# Altium PCB PCB2.0.PcbDoc (part 3 of 4)
Units mm, origin at the board's own origin, x right, y up, seen from the top; angles counter-clockwise.
Board outline 152.4 x 101.6 mm, 4 copper layers (Top Layer, Mid-Layer 1, Mid-Layer 2, Bottom Layer); 254 components, 501 nets, 1699 pads, 910 vias.
Unrouted connection lines stored in the file: 81.
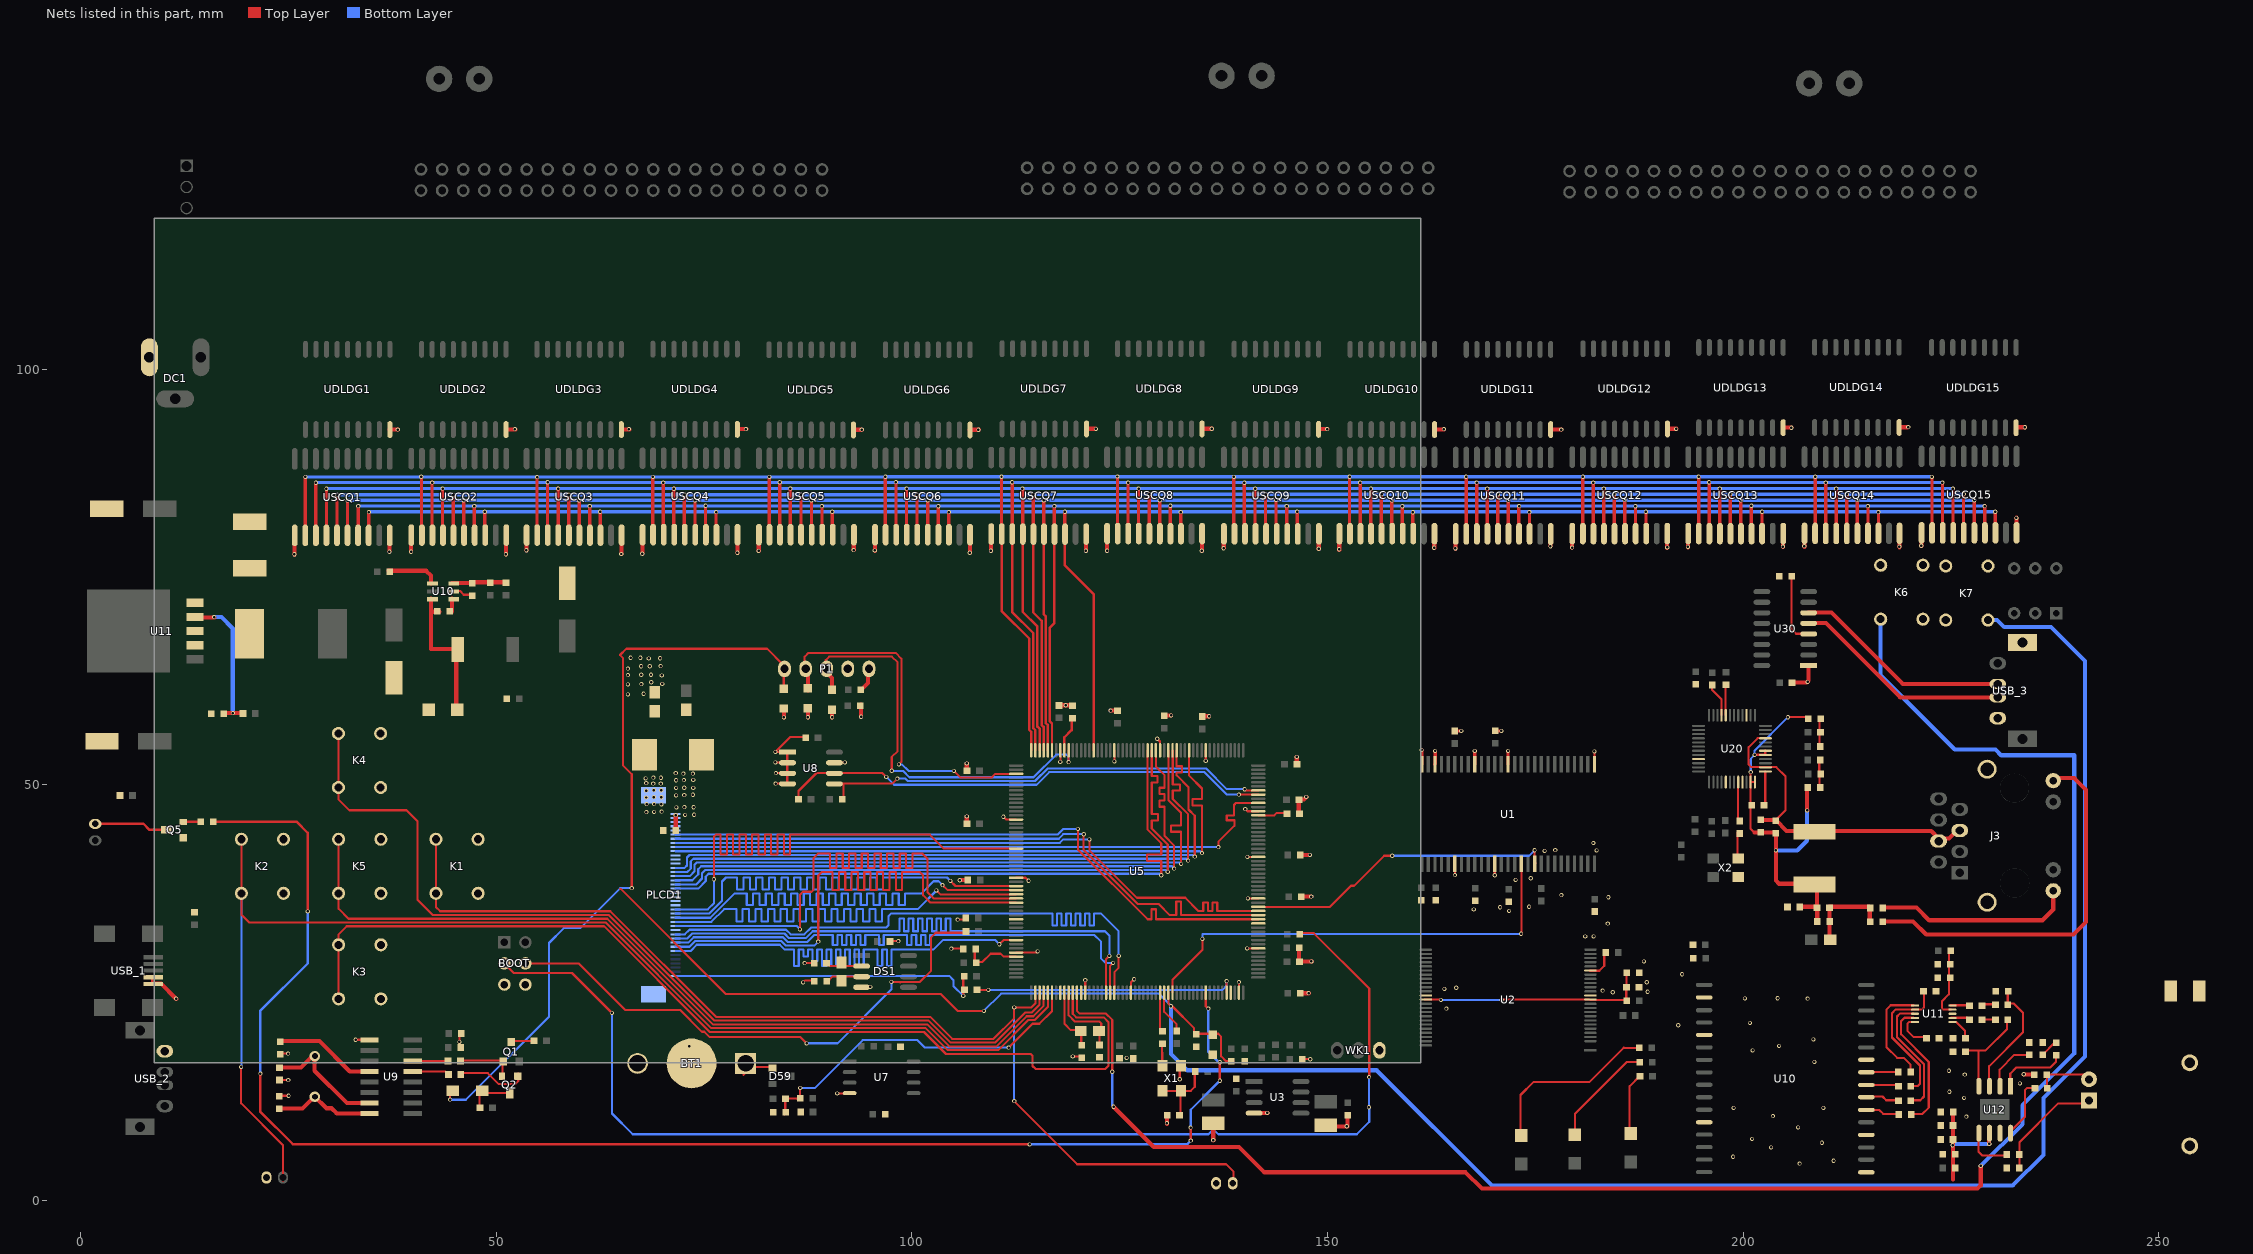
[diagram p5: the nets of this part, all layers, seen from the top]

## Via types
v1: diameter 0.5, hole 0.3, Top Layer to Bottom Layer, 910 vias

## Nets (pads, with @x,y where several pads share a name; then routed paths per layer and width w, separated by ;. In a path a pad name is that pad's centre, name@x,y a point inside that pad or via, vN(x,y) a via of type N, cw(c..) or ccw(c..) an arc to the next point about the centre after c; other vN are vias at no path point) (continued)
FMC_SDNRAS: U1.18 U5.70 | length 37.8
  Top Layer w0.254: U5.70@141.676,35.322 150.305,35.322 152.833,37.85 153.207,37.85 156.818,41.462 v1(157.8,41.462) ; v1(174.925,42.125) 174.925,40.684 175.025,40.584 U1.18@174.928,40.487
  Bottom Layer w0.254: v1(157.8,41.462) 174.262,41.462 v1(174.925,42.125)
FMC_SDNWE: U1.16 U5.35 | length 54.8
  Top Layer w0.254: U5.35@131.351,24.997 131.351,26.567 134.956,30.172 v1(134.956,31.457) ; v1@173.325,32.075 U1.16@173.325,40.034
  Bottom Layer w0.254: v1(134.956,31.457) 134.956,31.993 135.011,32.048 v1@173.298,32.048
  other v1: 173.3,32.075
FNSN: R100.1 U5.43 | length 181.9
  Top Layer w0.3: R100.1@15.9,45.575 25.95,45.575 27.3,44.225 v1(27.3,34.775) ; v1(21.6,15.25) 21.6,10.65 25.5,6.75 114.15,6.75 v1@114.2,6.7 ; v1(133.525,8.75) 133.525,7.225 v1(133.55,7.2) ; U5.43@135.351,24.997 135.351,23.374 v1@135.65,23.075 ; v1(137.05,16.625) v1(137.05,14.4) v1@137.075,14.375
  Bottom Layer w0.3: v1@21.6,15.225 v1(21.6,15.25) 21.6,22.825 27.3,28.525 v1(27.3,34.775) ; v1(114.15,6.725) 133.075,6.725 v1(133.55,7.2) v1@133.6,7.25 ; v1@133.55,8.7 133.55,10.9 v1(137.05,14.4) ; v1(135.675,23.075) 135.675,17.873 v1@137,16.548
GND: *R16.1 BOOT.5 BOOT.6 BT1.1@66.982,16.48 BT1.2 C1.1 C2.1 C3.1 C4.1 C5.1 C6.1 C7.1 C8.1 C9.1 C10.1 C11.1 C12.1 C14.1 C15.1 C16.1 C19.1 C20.2 C21.1 C22.2 C23.2 C24.1 C25.1 C26.2 C27.1 C28.1 C29.1 C30.1 C31.1 C32.1 C33.1 C34.1 C35.1 C36.1 C37.1 C38.1 C39.1 C40.1 C41.1 C42.1 C43.1 C44.1 C45.1 C46.1 C47.1 C48.1 C49.1 C52.1 C53.2 C54.2 C55.1 C56.1 C57.1 C58.1 C59.1 C61.1 C71.2 C73.2 C78.2 C79.2 C80.1 C81.1 C82.1 C83.1 C100.1 C101.2 C?.2 CA1.2 CA2.2 CD1.1 CD2.1 CE2.2 CE3.2 CE4.2 CE5.2 D2.1 D3.1 D18.2 D22.2 D23.2 D24.2 DC1.2 DS1.4 FB7.1 FB9.1 K1.1 K2.1 K3.1 K4.1 K5.1 K6.1 K7.2 P1.2 P15.2 P16.2 Q5.1 R2.1 R3.1 R35.1 R51.2 R52.2 R55.2 R?.1 U1.6 U1.12 U1.28 U1.41 U1.46 U1.52 U1.54 U2.13 U2.36 U3.4 U5.14 U5.25 U5.51 U5.60 U5.72 U5.82 U5.93 U5.114 U5.125 U5.136 U5.149 U5.170 U5.184 U5.202 U7.4 U8.1 U8.2 U8.3 U8.4 U8.7 U9.1 U10.2 U10.5@195.335,19.905 U10.12 U10.17 U10.20 U10.26 U11.3@13.725,68.5 U11.5@13.725,71.9 U11.8 U12.7 U20.15 U20.33 U20.41 U20.45 U30.1 UDLDG1.9 UDLDG2.9 UDLDG3.9 UDLDG4.9 UDLDG5.9 UDLDG6.9 UDLDG7.9 UDLDG8.9 UDLDG9.9 UDLDG10.9 UDLDG11.9 UDLDG12.9 UDLDG13.9 UDLDG14.9 UDLDG15.9 USB_1.4 USB_1.5 USB_2.4 USB_3.4 USB_3.5@233.65,67.125 USCQ1.1 USCQ1.10 USCQ2.1 USCQ2.10 USCQ3.1 USCQ3.10 USCQ4.1 USCQ4.10 USCQ5.1 USCQ5.10 USCQ6.1 USCQ6.10 USCQ7.1 USCQ7.10 USCQ8.1 USCQ8.10 USCQ9.1 USCQ9.10 USCQ10.1 USCQ10.10 USCQ11.1 USCQ11.10 USCQ12.1 USCQ12.10 USCQ13.1 USCQ13.10 USCQ14.1 USCQ14.10 USCQ15.1 USCQ15.10 WK1.3 X1.2 X2.2 | length 186.9
  Top Layer w0.254: C80.1@24.2,17.662 v1(24.925,17.662) ; C81.1@24.225,14.462 v1(24.95,14.462) ; C82.1@24.25,12.587 v1(25,12.587) ; v1(33.055,19.332) U9.1@34.525,19.332 ; U10.2@44.65,73.34 45.61,73.34 46.075,72.875 R55.2@47.3,72.875 ; C78.2@45.55,18.312 C79.2@45.55,19.812 ; v1(83.575,52.687) U8.2@84.995,52.687 ; v1(83.585,50.147) 84.995,50.147 U8.2@84.995,52.687 ; v1(83.63,51.417) U8.3@84.995,51.417 ; v1(86.9,26.225) 87.15,26.475 CD2.1@88.225,26.475 ; v1(87.075,28.55) CD1.1@88.25,28.55 ; C14.1@87.075,55.75 85.363,55.75 v1(83.57,53.957) 84.995,53.957 U8.2@84.995,52.687 ; U8.7@90.632,52.687 v1(91.925,52.687) ; v1(91.014,12.876) U7.4@92.171,12.876 ; DS1.4@93.65,25.677 v1(94.99,25.677) ; C3.1@97.15,31.175 97.175,31.2 v1(98.375,31.2) ; v1@104.725,30.325 *R16.1@106.05,30.325 ; v1(105.5,33.775) R2.1@106.475,33.775 ; v1(111,46.162) 111.34,45.822 U5.170@112.526,45.822 ; U5.202@112.526,29.822 114.997,29.822 v1(115.125,29.95) ; U5.184@112.526,38.822 113.665,38.822 v1(114.025,38.462) ; v1(117.851,52.763) U5.149@117.851,54.147 ; v1(119.35,17.325) C21.1@120.646,17.325 ; C21.1@120.375,17.275 120.471,17.275 C21.1@120.421,17.325 ; U5.14@120.851,24.997 v1(120.851,26.511) ; v1(124.351,52.813) U5.136@124.351,54.147 ; U5.25@126.351,24.997 126.351,26.238 v1(126.725,26.612) ; v1(129.525,55.537) 129.851,55.211 U5.125@129.851,54.147 ; v1(132.225,14.575) X1.2@132.225,16.2 ; v1(135.351,52.873) U5.114@135.351,54.147 ; U5.51@139.351,24.997 v1(139.351,26.261) ; v1(140.1,47.087) 140.365,46.822 U5.93@141.676,46.822 ; v1(140.335,30.322) U5.60@141.676,30.322 ; v1(140.365,41.322) U5.82@141.676,41.322 ; v1(140.416,36.322) U5.72@141.676,36.322 ; FB7.1@146.85,17 v1@147.9,17 ; v1(165.327,39.139) U1.6@165.327,40.487 ; v1(170.128,39.115) U1.12@170.128,40.487 ; v1(182.125,54.025) 182.125,52.489 U1.28@182.128,52.487
  Top Layer w0.4: v1(161.325,54.2) 161.325,52.489 U1.54@161.327,52.487 ; U1.52@162.927,52.487 162.925,52.489 162.95,52.514 v1(162.95,54.075) ; C9.1@165.327,56.487 v1(166.1,56.487) ; v1(167.725,54.075) 167.725,52.489 U1.46@167.727,52.487 ; C8.1@170.128,56.487 v1(170.925,56.487) ; v1(171.725,54.075) 171.725,52.49 U1.41@171.728,52.487
  Top Layer w0.5: USB_1.4@8.675,26.875 8.675,26.075 9.625,26.075 v1@11.475,24.225 ; v1@25.71,77.69 USCQ1.1@25.71,80.05 ; v1@37.14,78.06 USCQ1.10@37.14,80.05 ; UDLDG1.9@37.16,92.775 v1@38.175,92.775 ; v1@39.735,78.06 USCQ2.1@39.735,80.075 ; UDLDG2.9@51.135,92.775 v1@52.275,92.775 ; v1@51.165,77.74 USCQ2.10@51.165,80.075 ; v1@53.61,78.19 USCQ3.1@53.61,80.075 ; UDLDG3.9@65.01,92.775 v1@66,92.775 ; v1@65.04,77.76 USCQ3.10@65.04,80.075 ; v1@67.56,77.835 USCQ4.1@67.56,80.125 ; UDLDG4.9@78.96,92.8 v1@80.075,92.8 ; v1@78.99,77.915 USCQ4.10@78.99,80.125 ; v1@81.56,78.16 USCQ5.1@81.56,80.125 ; UDLDG5.9@92.935,92.725 v1@93.95,92.725 ; v1@92.99,78.265 USCQ5.10@92.99,80.125 ; v1@95.535,78.165 USCQ6.1@95.535,80.125 ; v1@105.775,38.55 C28.1@106.7,38.55 ; C29.1@106.6,45.325 v1(106.6,46.2) ; C30.1@106.6,51.7 v1(106.6,52.575) ; UDLDG6.9@106.96,92.725 v1@108.05,92.725 ; v1@106.965,77.94 USCQ6.10@106.965,80.125 ; v1@109.51,78.16 USCQ7.1@109.51,80.2 ; C31.1@117.675,59.575 C26.2@119.275,59.575 ; v1@120.94,78.165 USCQ7.10@120.94,80.2 ; UDLDG7.9@120.985,92.85 v1@122.1,92.85 ; v1@123.46,78.165 USCQ8.1@123.46,80.25 ; v1(123.9,58.925) C32.1@124.7,58.925 ; C33.1@130.325,58.35 v1(131.175,58.35) ; v1@130.675,9.2 C20.2@130.675,10.275 ; UDLDG8.9@134.885,92.85 v1@136.1,92.85 ; v1@134.89,78.165 USCQ8.10@134.89,80.25 ; C34.1@134.9,58.25 v1(135.75,58.25) ; v1@136.25,7.2 CA1.2@136.25,9.3 ; v1@137.51,78.49 USCQ9.1@137.51,80.225 ; U3.4@141.15,10.515 v1@142.765,10.515 ; v1@146.275,53.35 146.3,53.325 146.3,52.5 C35.1@146.325,52.525 ; C25.1@146.55,46.6 146.55,48.25 147.175,48.25 v1@147.45,48.525 ; C39.1@146.575,28.775 R3.1@146.575,30.4 ; C39.1@146.6,28.75 v1@148.15,28.75 ; C40.1@146.7,24.925 v1@147.75,24.925 ; C37.1@146.7,41.575 v1(147.875,41.575) ; C38.1@146.8,36.55 v1(148.05,36.55) ; UDLDG9.9@148.91,92.8 v1@150,92.8 ; v1@148.94,78.39 USCQ9.10@148.94,80.225 ; CA2.2@149.75,9.075 149.95,8.875 152.4,8.875 C19.1@152.4,10.25 ; v1@151.41,78.265 USCQ10.1@151.41,80.25 ; v1@162.84,78.515 USCQ10.10@162.84,80.25 ; UDLDG10.9@162.86,92.775 v1@164,92.775 ; v1@165.41,78.41 USCQ11.1@165.41,80.225 ; UDLDG11.9@176.835,92.775 v1@178.175,92.775 ; v1@176.84,78.735 USCQ11.10@176.84,80.225 ; v1@179.435,78.54 USCQ12.1@179.435,80.25 ; v1@190.865,78.535 USCQ12.10@190.865,80.25 ; UDLDG12.9@190.885,92.85 v1@192,92.85 ; v1@193.385,78.59 USCQ13.1@193.385,80.25 ; UDLDG13.9@204.81,93 v1@205.85,93 ; v1@204.815,78.64 USCQ13.10@204.815,80.25 ; C100.1@205.875,62.325 207.675,62.325 207.875,62.525 U30.1@207.875,64.375 ; v1@207.385,78.635 USCQ14.1@207.385,80.275 ; UDLDG14.9@218.76,93.025 v1@219.8,93.025 ; v1@218.815,78.59 USCQ14.10@218.815,80.275 ; v1@221.46,78.735 USCQ15.1@221.46,80.35 ; UDLDG15.9@232.835,93 232.86,93.025 v1(233.925,93.025) ; USCQ15.10@232.89,80.35 v1@232.89,82.14 ; v1@233.775,15.15 C58.1@235.025,15.15
  Top Layer w0.508: v1(84.59,58.102) D24.2@84.59,58.989 ; v1(87.485,58.122) D23.2@87.485,58.989 ; v1(90.381,58.131) D22.2@90.381,58.989 ; v1(93.875,58.2) C2.1@93.875,59.675
  Top Layer w1: BT1.2@73.207,15.08 v1(73.207,18.569)
  other v1: 206.8,4.425 210.9,4.775 198.8,5.25 203.375,6.375 209.5,6.925 136.25,7.25 201.1,7.4 206.625,8.775 152.325,8.925 130.675,9.3 226.875,10.075 203.6,10.15 142.75,10.525 198.875,11.125 209.675,11.125 226.6,12.325 224.825,13.075 233.325,14.075 226.675,15.125 233.775,15.175 224.775,15.6 208.6,16.65 147.925,16.975 125.825,17.15 201.15,18.05 204.35,18.575 45.55,19.062 208.475,19.375 192.2,21.075 200.825,21.35 164.3,23.075 11.45,24.275 207.775,24.275 200.225,24.3 204.15,24.325 147.725,24.95 184.325,25.05 188.525,25.1 183.1,25.25 164.075,25.45 165.5,25.575 188.425,26.25 192.675,27.2 148.075,28.75 188.075,28.75 104.75,30.3 181.025,31.75 182.025,31.75 183.725,33.3 171.85,34.825 167.6,35 170.775,35.275 174.25,35.325 183.8,36.475 178.15,36.725 105.75,38.525 172.625,38.55 174.45,38.75 176.125,42.05 182.375,42.1 177.4,42.15 182,43 147.45,48.55 146.3,53.35 118.5,59.575 65.828,60.878 67.7,60.962 65.828,62.078 67.45,62.112 69.95,62.137 68.625,62.337 207.775,62.375 69.9,63.162 65.828,63.203 67.425,63.237 68.6,63.237 65.828,63.978 67.4,64.262 68.45,64.262 69.75,64.287 68.325,65.212 69.7,65.237 66.15,65.287 67.325,65.287 25.7,77.75 51.15,77.75 65.025,77.775 67.55,77.8 79,77.925 106.95,77.925 37.125,78.05 39.725,78.05 81.55,78.15 109.5,78.175 120.925,78.175 123.475,78.175 134.875,78.175 95.525,78.2 53.6,78.225 92.975,78.25 151.4,78.35 148.95,78.4 165.4,78.45 137.5,78.475 162.825,78.525 179.425,78.55 190.875,78.575 193.375,78.625 204.8,78.675 218.825,78.675 176.825,78.7 207.375,78.725 221.45,78.775 232.9,82.125 108,92.725 38.125,92.75 93.95,92.75 178.125,92.75 52.225,92.8 65.95,92.8 80.025,92.8 149.95,92.8 164,92.8 122.125,92.825 191.95,92.825 136.075,92.85 205.825,92.975 219.875,93.05
GPIO0: U5.49
HALL1_IN: U5.8
IIC_SCL: R12.2 U5.97 U8.6 | length 61.1
  Top Layer w0.254: R12.2@86.275,48.3 86.35,48.375 86.35,49.25 88.517,51.417 U8.6@90.632,51.417 ; 89.077,51.417 U8.6@90.632,51.417 ; v1(96.9,50.962) 96.445,51.417 U8.6@90.632,51.417 ; v1(139.335,48.822) U5.97@141.676,48.822
  Bottom Layer w0.254: v1(96.9,50.962) 97.85,50.012 115,50.012 116.508,51.52 135.206,51.52 137.904,48.822 v1(139.335,48.822)
IIC_SDA: R13.2 U5.98 U8.5 | length 55.1
  Top Layer w0.254: U8.5@90.632,50.147 91.775,50.147 ; R13.2@91.4,48.3 91.775,48.675 91.775,50.147 ; v1(98.25,50.75) 97.647,50.147 91.775,50.147 ; v1(140.025,49.475) 140.178,49.322 U5.98@141.676,49.322
  Bottom Layer w0.254: v1(98.25,50.75) 99.223,50.75 99.509,50.464 114.813,50.464 116.321,51.972 135.393,51.972 137.891,49.475 v1@140,49.475
JTCK-SWCLK: D23.1 P1.4 U5.159 | length 43.5
  Top Layer w0.254: P1.4@87.08,63.612 87.08,65.411 87.55,65.881 98.028,65.881 98.722,65.187 98.722,52.759 v1(98.425,52.462) ; v1(105.05,51.675) 105.863,50.862 109.567,50.862 110.028,51.322 U5.159@112.526,51.322
  Top Layer w0.508: D23.1@87.485,61.389 P1.4@87.485,63.207
  Bottom Layer w0.254: v1(98.425,52.462) 98.789,52.462 99.576,51.675 v1(105.05,51.675)
JTMS-SWDIO: D22.1 P1.3 U5.147 | length 51.2
  Top Layer w0.254: P1.3@89.62,63.612 89.62,65.007 90.042,65.429 97.575,65.429 98.27,64.734 98.27,54.057 97.575,53.362 v1(97.575,51.687) ; v1(118.851,52.738) U5.147@118.851,54.147
  Top Layer w0.508: P1.3@89.62,63.612 90.381,62.851 D22.1@90.381,61.389
  Bottom Layer w0.254: v1(97.575,51.687) 98.925,51.687 99.696,50.916 114.625,50.916 117.346,53.637 118.575,53.637 118.851,53.361 v1(118.851,52.738)
KEY1: K1.2 P15.1 U5.2 | length 134.6
  Top Layer w0.254: K1.2@42.723,43.451 K1.2@42.723,36.951 42.723,35.289 43.225,34.787 63.712,34.787 76.425,22.074 102.201,22.074 104.849,19.426 108.48,19.426 ; 107.5,19.426 108.48,19.426 ; v1(112.3,11.937) 119.887,4.35 137.8,4.35 138.7,3.45 138.7,2.025 P15.1@138.5,1.825 ; U5.2@114.851,24.997 114.851,23.688 114.375,23.212 v1(112.3,23.212) 112.3,21.915 109.811,19.426 108.48,19.426
  Bottom Layer w0.254: v1(112.3,11.937) v1(112.3,23.212)
KEY2: K2.2 U5.5 | length 156.5
  Top Layer w0.254: v1(19.275,16.05) 19.275,11.675 24.325,6.625 24.325,2.325 ; K2.2@19.304,43.451 K2.2@19.304,36.951 19.304,34.396 20.269,33.431 23.476,33.431 ; 20.656,33.431 23.476,33.431 ; U5.5@116.351,24.997 116.351,23.27 114.783,21.702 114.005,21.702 110.373,18.07 104.287,18.07 101.64,20.718 75.863,20.718 63.151,33.431 23.476,33.431
  Bottom Layer w0.254: K2.2@19.304,36.951 19.304,15.871 v1@19.325,15.85
KEY3: K3.2 U5.11 | length 121.3
  Top Layer w0.254: K3.2@31.013,24.251 K3.2@31.013,30.751 31.013,32 31.992,32.979 62.963,32.979 75.676,20.266 101.452,20.266 104.1,17.618 114.294,17.618 114.512,17.4 114.512,16.175 114.875,15.812 123.275,15.812 123.648,16.185 123.648,21.427 123.059,22.016 119.775,22.016 119.351,22.44 U5.11@119.351,24.997
KEY4: K4.2 U5.3 | length 113.3
  Top Layer w0.254: K4.2@30.988,56.179 K4.2@30.988,49.679 30.988,48.249 32.3,46.937 39.175,46.937 40.5,45.612 40.5,36.162 42.327,34.335 63.525,34.335 76.238,21.622 102.014,21.622 104.662,18.974 109.999,18.974 113.631,22.606 114.409,22.606 115.351,23.549 U5.3@115.351,24.997
KEY5: K5.2 U5.4 | length 103.7
  Top Layer w0.254: K5.2@31.013,43.451 K5.2@31.013,36.951 31.013,35.074 32.204,33.883 63.338,33.883 76.05,21.17 101.827,21.17 104.475,18.522 110.186,18.522 113.818,22.154 114.596,22.154 115.851,23.409 U5.4@115.851,24.997
KEY6: K6.2 U5.12 | length 216.5
  Top Layer w0.254: U5.12@119.851,24.997 119.851,22.817 120.2,22.468 123.357,22.468 124.1,21.725 v1(124.1,15.475)
  Top Layer w0.5: v1(124.252,11.264) 129.091,6.425 139.35,6.425 142.4,3.375 166.625,3.375 168.575,1.425 228.225,1.425 228.6,1.8 v1(228.6,4.15)
  Bottom Layer w0.254: v1(124.1,15.475) 124.1,11.416 v1(124.252,11.264)
  Bottom Layer w0.5: K6.2@216.545,69.95 216.545,63.18 225.475,54.25 230.375,54.25 231.075,53.55 239.85,53.55 239.85,17.675 233.625,11.45 233.625,9.15 v1@228.6,4.125
KEY7: U5.13
LCD_B3: PLCD1.24 U5.177 | length 78.7
  Top Layer w0.254: v1(76.175,38.637) 76.175,43.787 76.4,44.012 76.962,44.012 76.962,41.625 77.724,41.625 77.724,44.012 78.486,44.012 78.486,41.625 79.248,41.625 79.248,44.012 80.01,44.012 80.01,41.625 80.772,41.625 80.772,44.012 81.534,44.012 81.534,41.625 82.296,41.625 82.296,44.012 83.058,44.012 83.058,41.625 83.82,41.625 83.82,44.012 84.582,44.012 84.582,41.625 85.344,41.625 85.344,44.012 102.15,44.012 103.84,42.322 U5.177@112.526,42.322
  Bottom Layer w0.254: PLCD1.24@71.575,35.012 75.45,35.012 76.175,35.737 v1(76.175,38.637)
LCD_B4: PLCD1.25 U5.186 | length 78.7
  Top Layer w0.254: v1(104.625,38.437) 105.24,37.822 U5.186@112.526,37.822
  Bottom Layer w0.254: PLCD1.25@71.575,34.512 75.589,34.512 77.145,36.067 77.145,38.367 77.625,38.847 78.968,38.847 78.968,37.421 79.73,37.421 79.73,38.847 80.492,38.847 80.492,37.421 81.254,37.421 81.254,38.847 82.016,38.847 82.016,37.421 82.778,37.421 82.778,38.847 83.54,38.847 83.54,37.421 84.302,37.421 84.302,38.847 85.064,38.847 85.064,37.421 85.826,37.421 85.826,38.847 86.588,38.847 86.588,37.421 87.35,37.421 87.35,38.847 88.112,38.847 88.112,37.421 88.874,37.421 88.874,38.847 89.636,38.847 89.636,37.421 90.398,37.421 90.398,38.847 91.16,38.847 91.16,37.421 91.922,37.421 91.922,38.847 92.684,38.847 92.684,37.421 93.446,37.421 93.446,38.847 94.208,38.847 94.208,37.421 94.97,37.421 94.97,38.847 95.732,38.847 95.732,37.421 96.494,37.421 96.494,38.847 104.215,38.847 v1(104.625,38.437)
LCD_B5: PLCD1.26 U5.187 | length 78.7
  Top Layer w0.254: v1(103.675,37.937) 104.29,37.322 U5.187@112.526,37.322
  Bottom Layer w0.254: PLCD1.26@71.575,34.012 75.729,34.012 78.629,36.912 80.118,36.912 80.118,35.545 80.88,35.545 80.88,36.912 81.642,36.912 81.642,35.545 82.404,35.545 82.404,36.912 83.166,36.912 83.166,35.545 83.928,35.545 83.928,36.912 84.69,36.912 84.69,35.545 85.452,35.545 85.452,36.912 86.214,36.912 86.214,35.545 86.976,35.545 86.976,36.912 87.738,36.912 87.738,35.545 88.5,35.545 88.5,36.912 89.262,36.912 89.262,35.545 90.024,35.545 90.024,36.912 90.786,36.912 90.786,35.545 91.548,35.545 91.548,36.912 92.31,36.912 92.31,35.545 93.072,35.545 93.072,36.912 93.834,36.912 93.834,35.545 94.596,35.545 94.596,36.912 95.358,36.912 95.358,35.545 96.12,35.545 96.12,36.912 96.882,36.912 96.882,35.545 97.644,35.545 97.644,36.912 98.406,36.912 98.406,35.545 99.168,35.545 99.168,36.912 101.117,36.912 102.6,38.395 103.217,38.395 v1(103.675,37.937)
LCD_B6: PLCD1.27 U5.188 | length 78.7
  Top Layer w0.254: v1(102.95,37.287) 103.415,36.822 U5.188@112.526,36.822
  Bottom Layer w0.254: PLCD1.27@71.575,33.512 75.868,33.512 77.393,35.037 78.868,35.037 78.868,33.536 79.63,33.536 79.63,35.037 80.392,35.037 80.392,33.536 81.154,33.536 81.154,35.037 81.916,35.037 81.916,33.536 82.678,33.536 82.678,35.037 83.44,35.037 83.44,33.536 84.202,33.536 84.202,35.037 84.964,35.037 84.964,33.536 85.726,33.536 85.726,35.037 86.488,35.037 86.488,33.536 87.25,33.536 87.25,35.037 88.012,35.037 88.012,33.536 88.774,33.536 88.774,35.037 89.536,35.037 89.536,33.536 90.298,33.536 90.298,35.037 91.06,35.037 91.06,33.536 91.822,33.536 91.822,35.037 92.584,35.037 92.584,33.536 93.346,33.536 93.346,35.037 94.108,35.037 94.108,33.536 94.87,33.536 94.87,35.037 95.632,35.037 95.632,33.536 96.394,33.536 96.394,35.037 100.7,35.037 v1(102.95,37.287)
LCD_B7: PLCD1.28 U5.189 | length 78.7
  Top Layer w0.254: v1(86.525,32.612) 86.525,36.787 86.875,37.137 87.925,37.137 88.152,37.364 88.152,41.164 88.739,41.751 90.143,41.751 90.143,39.997 90.905,39.997 90.905,41.751 91.667,41.751 91.667,39.997 92.429,39.997 92.429,41.751 93.191,41.751 93.191,39.997 93.953,39.997 93.953,41.751 94.715,41.751 94.715,39.997 95.477,39.997 95.477,41.751 96.239,41.751 96.239,39.997 97.001,39.997 97.001,41.751 97.763,41.751 97.763,39.997 98.525,39.997 98.525,41.751 99.287,41.751 99.287,39.997 100.049,39.997 100.049,41.751 101.214,41.751 101.875,41.09 101.875,37.062 102.615,36.322 U5.189@112.526,36.322
  Bottom Layer w0.254: PLCD1.28@71.575,33.012 86.125,33.012 v1(86.525,32.612)
LCD_BL: PLCD1.34 U5.199 | length 79.2
  Top Layer w0.254: v1(110.525,30.812) 111.035,31.322 U5.199@112.526,31.322
  Bottom Layer w0.254: PLCD1.34@71.575,30.012 73.368,30.012 74.108,30.751 84.103,30.751 84.651,30.204 85.813,30.204 85.813,28.188 86.372,28.188 86.372,30.204 86.931,30.204 86.931,29.332 87.49,29.332 87.49,30.204 88.048,30.204 88.048,28.801 88.607,28.801 88.607,30.204 89.166,30.204 89.166,28.188 89.725,28.188 89.725,30.204 90.284,30.204 90.284,28.188 90.842,28.188 90.842,30.204 91.401,30.204 91.401,28.188 91.96,28.188 91.96,30.204 92.519,30.204 92.519,28.188 93.078,28.188 93.078,30.204 93.636,30.204 93.636,28.188 94.195,28.188 94.195,30.204 95.872,30.204 95.872,28.188 96.43,28.188 96.43,30.204 96.989,30.204 96.989,28.188 97.548,28.188 97.548,30.204 102.604,30.204 103.75,31.35 109.987,31.35 v1(110.525,30.812)
LCD_CLK: PLCD1.30 U5.21 | length 78.7
  Top Layer w0.254: U5.21@124.351,24.997 124.351,27.463 124.875,27.987 v1(124.875,29.412)
  Bottom Layer w0.254: PLCD1.30@71.575,32.012 72.677,32.012 73.225,32.56 84.852,32.56 85.4,32.012 87.05,32.012 87.875,32.837 96.925,32.837 97.175,33.087 97.175,34.187 97.525,34.537 116.891,34.537 116.891,33.056 117.45,33.056 117.45,34.537 118.009,34.537 118.009,33.056 118.568,33.056 118.568,34.537 119.127,34.537 119.127,33.056 119.685,33.056 119.685,34.537 120.244,34.537 120.244,33.056 120.803,33.056 120.803,34.537 121.362,34.537 121.362,33.056 121.921,33.056 121.921,34.537 122.7,34.537 124.875,32.362 v1(124.875,29.412)
LCD_DE: PLCD1.33 U5.190 | length 78.7
  Top Layer w0.254: v1(88.725,31.137) 88.725,39.087 89.15,39.512 90.443,39.512 90.443,37.343 91.205,37.343 91.205,39.512 91.967,39.512 91.967,37.343 92.729,37.343 92.729,39.512 93.491,39.512 93.491,37.343 94.253,37.343 94.253,39.512 95.015,39.512 95.015,37.343 95.777,37.343 95.777,39.512 96.539,39.512 96.539,37.343 97.301,37.343 97.301,39.512 98.063,39.512 98.063,37.343 98.825,37.343 98.825,39.512 100.923,39.512 101.35,39.085 101.35,36.712 102.24,35.822 U5.190@112.526,35.822
  Bottom Layer w0.254: PLCD1.33@71.575,30.512 73.229,30.512 73.92,31.204 84.29,31.204 84.838,30.656 88.244,30.656 v1(88.725,31.137)
LCD_G2: PLCD1.14 U5.121 | length 78.7
  Top Layer w0.254: U5.121@131.851,54.147 131.851,52.231 132.507,52.231 132.507,51.469 131.851,51.469 131.851,51.136 133.275,49.712 133.275,47.037 134.025,46.287 v1(134.025,41.362)
  Bottom Layer w0.254: PLCD1.14@71.575,40.012 72.65,40.012 72.925,40.287 72.925,41.26 73.225,41.56 133.827,41.56 v1(134.025,41.362)
LCD_G3: PLCD1.15 U5.122 | length 78.7
  Top Layer w0.254: U5.122@131.351,54.147 131.376,54.122 131.376,50.056 132.271,50.056 132.271,49.294 131.376,49.294 131.376,48.297 133.225,46.448 v1(133.225,40.887)
  Bottom Layer w0.254: PLCD1.15@71.575,39.512 72.975,39.512 73.377,39.914 73.377,40.785 73.7,41.108 133.004,41.108 v1(133.225,40.887)
LCD_G4: PLCD1.16 U5.123 | length 78.7
  Top Layer w0.254: U5.123@130.851,54.147 130.851,48.182 132.375,46.658 132.375,45.119 131.159,45.119 131.159,44.357 132.375,44.357 v1(132.375,40.487)
  Bottom Layer w0.254: PLCD1.16@71.575,39.012 73.25,39.012 73.829,39.591 73.829,40.385 74.1,40.656 132.206,40.656 v1(132.375,40.487)
LCD_G5: PLCD1.17 U5.126 | length 78.7
  Top Layer w0.254: U5.126@129.351,54.147 129.351,52.212 130.399,51.164 130.399,49.644 129.79,49.644 129.79,48.882 130.399,48.882 130.399,48.12 129.79,48.12 129.79,47.358 130.399,47.358 130.399,43.838 131.55,42.687 v1(131.55,39.912)
  Bottom Layer w0.254: PLCD1.17@71.575,38.512 73.575,38.512 74.281,39.218 74.281,39.835 74.65,40.204 131.258,40.204 v1(131.55,39.912)
LCD_G6: PLCD1.18 U5.127 | length 78.7
  Top Layer w0.254: U5.127@128.851,54.147 128.851,51.056 129.54,51.056 129.54,50.294 128.851,50.294 128.851,46.484 129.619,46.484 129.619,45.722 128.851,45.722 128.851,44.747 130.775,42.823 v1(130.775,39.512)
  Bottom Layer w0.254: PLCD1.18@71.575,38.012 74.025,38.012 74.733,38.72 74.733,39.36 75.125,39.751 130.536,39.751 v1(130.775,39.512)
LCD_G7: PLCD1.19 U5.128 | length 78.7
  Top Layer w0.254: U5.128@128.351,54.147 128.351,44.607 130,42.958 130,41.619 128.268,41.619 128.268,40.857 130,40.857 v1(130,39.112)
  Bottom Layer w0.254: PLCD1.19@71.575,37.512 74.275,37.512 75.186,38.423 75.186,38.96 75.525,39.299 129.813,39.299 v1(130,39.112)
LCD_HSYNC: PLCD1.31 U5.19 | length 78.7
  Top Layer w0.254: U5.19@123.351,24.997 123.351,29.013 v1(123.75,29.412)
  Bottom Layer w0.254: PLCD1.31@71.575,31.512 72.95,31.512 73.546,32.108 84.665,32.108 85.213,31.56 87.237,31.56 88.062,32.385 98.479,32.385 98.479,33.927 99.038,33.927 99.038,32.385 99.597,32.385 99.597,33.927 100.156,33.927 100.156,32.385 100.715,32.385 100.715,33.927 101.273,33.927 101.273,32.385 101.832,32.385 101.832,33.927 102.391,33.927 102.391,32.385 102.95,32.385 102.95,33.927 103.509,33.927 103.509,32.385 104.067,32.385 104.067,33.927 104.626,33.927 104.626,32.385 123.227,32.385 123.75,31.862 v1(123.75,29.412)
LCD_R2: U5.66
LCD_R3: PLCD1.6 U5.67 | length 78.7
  Top Layer w0.254: v1(119.975,44.687) 119.975,42.208 128.361,33.822 128.829,33.822 128.829,35.026 129.388,35.026 129.388,33.822 U5.67@141.676,33.822
  Bottom Layer w0.254: PLCD1.6@71.575,44.012 117.521,44.012 118.196,44.687 v1(119.975,44.687)
LCD_R4: PLCD1.7 U5.68 | length 78.7
  Top Layer w0.254: v1(120.662,44.062) 120.662,42.16 127.161,35.662 129.675,35.662 131.015,34.322 131.804,34.322 131.804,35.954 132.363,35.954 132.363,34.322 U5.68@141.676,34.322
  Bottom Layer w0.254: PLCD1.7@71.575,43.512 117.661,43.512 118.211,44.062 v1(120.662,44.062)
LCD_R5: PLCD1.8 U5.69 | length 78.7
  Top Layer w0.254: v1(121.35,43.437) 121.35,42.112 127.056,36.406 132.881,36.406 134.465,34.822 135.054,34.822 135.054,35.852 135.613,35.852 135.613,34.822 136.172,34.822 136.172,35.852 136.731,35.852 136.731,34.822 U5.69@141.676,34.822
  Bottom Layer w0.254: PLCD1.8@71.575,43.012 117.8,43.012 118.225,43.437 v1(121.35,43.437)
LCD_R6: PLCD1.9 U5.95 | length 76
  Top Layer w0.254: v1(136.875,42.5) 136.875,43.15 138.8,45.075 138.8,45.74 137.875,45.74 137.875,46.299 138.75,46.299 138.75,47.575 138.997,47.822 U5.95@141.676,47.822
  Bottom Layer w0.254: PLCD1.9@71.575,42.512 v1@136.825,42.512
LCD_R7: PLCD1.10 U5.118 | length 78.7
  Top Layer w0.254: U5.118@133.351,54.147 133.351,51.111 134.9,49.562 134.9,48.294 133.74,48.294 133.74,47.532 134.9,47.532 v1(134.9,41.787)
  Bottom Layer w0.254: PLCD1.10@71.575,42.012 134.675,42.012 v1(134.9,41.787)
LCD_RESET: R10.1 U5.48 | length 32.2
  Top Layer w0.254: R10.1@107.8,25.325 v1(109.2,25.325) ; U5.48@137.851,24.997 v1(137.851,26.388)
  Bottom Layer w0.254: v1(109.2,25.325) 137.388,25.325 137.851,25.788 v1(137.851,26.388)
LCD_RESIN: *R11.2 PLCD1.40 R10.2 | length 38.3
  Top Layer w0.254: v1@106.175,24.65 *R11.2@106.175,26.925
  Bottom Layer w0.254: PLCD1.40@71.575,27.012 104.488,27.012 105,26.5 105,25.775 v1(106.175,24.6)
LCD_VSYNC: PLCD1.32 U5.20 | length 78.7
  Top Layer w0.254: U5.20@123.851,24.997 123.851,28.213 v1(124.2,28.562)
  Bottom Layer w0.254: PLCD1.32@71.575,31.012 73.089,31.012 73.733,31.656 84.478,31.656 85.025,31.108 87.425,31.108 88.25,31.933 90.463,31.933 90.463,30.746 91.022,30.746 91.022,31.933 91.581,31.933 91.581,30.746 92.14,30.746 92.14,31.933 92.698,31.933 92.698,30.746 93.257,30.746 93.257,31.933 93.816,31.933 93.816,30.746 94.375,30.746 94.375,31.933 96.051,31.933 96.051,30.746 96.61,30.746 96.61,31.933 99.404,31.933 99.404,30.746 99.963,30.746 99.963,31.933 100.522,31.933 100.522,30.746 101.08,30.746 101.08,31.933 101.639,31.933 101.639,30.746 102.198,30.746 102.198,31.933 121.954,31.933 122.725,31.162 122.725,29.137 123.3,28.562 v1(124.2,28.562)
LCDGND: C13.1 D60.1 FB9.2 PLCD1.3 PLCD1.4 PLCD1.5 PLCD1.11 PLCD1.12 PLCD1.13 PLCD1.20 PLCD1.21 PLCD1.22 PLCD1.23 PLCD1.29 PLCD1.A PLCD1.B
  other v1: 68.05,46.725 68.975,46.75 69.875,46.775 69.85,47.65 68.075,47.675 68.975,47.675 68.025,48.475 69.85,48.5 68.95,48.525 68.025,49.3 69.825,49.35 68.95,49.375 68.875,50.15 69.775,50.15 68.025,50.2 67.95,50.775 69.8,50.85 68.9,50.875
LCDVCC5: C13.2 D60.2 FB8.2 PLCD1.1 PLCD1.2 | length 1.8
  Top Layer w0.5: C13.2@71.575,44.55 v1(71.575,46.35)
  other v1: 72.7,46.375 73.775,46.4 71.65,47.275 73.725,47.3 72.625,47.325 71.625,48.725 72.6,48.775 73.65,48.8 71.625,49.625 73.675,49.625 72.6,49.65 71.625,50.55 72.55,50.575 73.675,50.6 72.5,51.362 73.65,51.362 71.575,51.412
MCLK: R22.2@130.15,20.35 U5.32 | length 4.8
  Top Layer w0.254: U5.32@129.851,24.997 129.851,20.374 R22.2@129.975,20.25
Net*R15_2: *R15.2 U5.33 | length 5.4
  Top Layer w0.254: U5.33@130.351,24.997 130.351,22.699 131.85,21.2 *R15.2@131.85,20.175
Net*R16_2: *R16.2 R17.2 U5.203 | length 7.2
  Top Layer w0.254: *R16.2@107.55,30.325 107.55,28.675 108.475,28.675 109.475,29.675 110.675,29.675 111.028,29.322 U5.203@112.526,29.322
Net*R19_2: *R19.2 C23.1 R18.2 U5.6 | length 42.2
  Top Layer w0.254: C23.1@84.675,10.35 84.75,10.425 84.75,12.275 86.15,12.275 86.2,12.225 86.55,12.225 v1(86.55,13.525) ; v1@111.65,18.4 114.5,21.25 115.325,21.25 116.851,22.776 U5.6@116.851,24.997
  Bottom Layer w0.254: v1@86.55,13.5 88.3,13.5 94.075,19.275 100.675,19.275 101.575,18.375 v1(111.625,18.375)
Net*R48_1: *R48.1 U20.21 | length 4.1
  Top Layer w0.254: *R48.1@196.255,62.055 196.255,61.47 197.4,60.325 U20.21@197.4,58.4
NetBOOT_3: BOOT.3 R4.1 | length 148.2
  Top Layer w0.254: BOOT.3@50.825,28.597 50.9,28.522 52.072,27.35 59.1,27.35 v1(63.9,22.55) v1@63.975,22.475 ; R4.1@146.532,32.156 148.363,32.156 155.025,25.493 155.025,14.85 v1@155.075,14.8
  Bottom Layer w0.254: v1(63.9,22.55) 63.9,10.45 66.4,7.95 135.687,7.95 136.037,8.3 136.513,8.3 136.863,7.95 153.525,7.95 155.025,9.45 155.025,11.15 v1(154.975,11.2) ; v1@155,11.2 v1(155,14.825)
NetBOOT_4: BOOT.4 R5.2 | length 65.5
  Top Layer w0.254: BOOT.4@53.44,28.522 59.878,28.522 65.5,22.9 72.1,22.9 74.718,20.282 75.021,20.282 75.628,19.675 86.525,19.675 v1(87.325,18.875) ; v1@97.582,26.307 97.614,26.275 98.569,26.275 98.594,26.25 98.614,26.27 100.548,26.27 100.553,26.275 100.95,26.275 102.3,27.625 102.3,31.65 102.85,32.2 R5.2@106.475,32.2
  Bottom Layer w0.254: v1@87.275,18.9 91.05,18.9 97.525,25.375 v1(97.525,26.275)
NetBT1_1: BT1.1@79.982,16.48 D59.1 | length 3.8
  Top Layer w0.254: 79.707,15.08 80.683,16.056 D59.1@83.13,16.056
NetC4_2: C4.2 C5.2 R8.1 U2.12 U2.37 | length 27.6
  Top Layer w0.254: U2.37@161.668,24.156 v1@163.669,24.156 ; v1@170.95,24.15 181.462,24.15 U2.12@181.468,24.156 ; U2.12@181.618,24.131 185.869,24.131 185.95,24.05 185.95,25.581 185.975,25.606 C5.2@185.975,27.4
  Bottom Layer w0.254: v1(163.65,24.125) v1(170.975,24.125)
NetC20_1: C20.1 L1.2 X1.1 X1.4 | length 9.2
  Top Layer w0.254: X1.4@130.1,13.175 X1.1@132.3,13.175 ; C20.1@132.325,10.125 132.3,10.15 X1.1@132.3,13.175 ; L1.2@134.025,15.675 134.025,13.65 133.55,13.175 X1.1@132.3,13.175
NetC21_2: C21.2 U5.9 Y2.1 | length 8
  Top Layer w0.254: U5.9@118.351,24.997 118.351,21.249 119.113,20.487 Y2.1@120.575,20.487 ; C21.2@120.375,18.775 Y2.1@120.375,20.462
NetC22_1: C22.1 U5.10 Y2.2 | length 9.6
  Top Layer w0.254: U5.10@118.851,24.997 118.851,22.274 119.6,21.525 122.55,21.525 122.775,21.3 Y2.2@122.775,20.487 ; C22.1@122.575,18.775 Y2.2@122.575,20.462
NetC25_2: C25.2 U5.92 | length 3.4
  Top Layer w0.254: U5.92@141.676,46.322 143.597,46.322 143.9,46.625 C25.2@144.99,46.625
NetC26_1: C26.1 U5.148 | length 4.2
  Top Layer w0.3: U5.148@118.351,54.147 118.353,54.149 118.353,55.728 119.2,56.575 C26.1@119.2,58.025
NetC46_2: C46.2 U11.5@220.7,21.45 | length 4.3
  Top Layer w0.254: U11.5@220.525,21.475 220,21.475 219.775,21.25 219.775,20.4 220.5,19.675 C46.2@222.075,19.675
NetC47_2: C47.2 C48.2 R27.2 U11.9 | length 8.5
  Top Layer w0.254: R27.2@224.775,30.075 224.775,28.45 224.775,24.8 223.95,23.975 223.95,23.075 224.05,22.975 U11.9@225.025,22.975
NetC49_2: C49.2 U11.6 | length 2.8
  Top Layer w0.254: U11.6@225.025,21.475 225.625,21.475 226.725,20.375 C49.2@226.725,19.725
NetC50_1: C50.1 U11.10 | length 2.2
  Top Layer w0.3: U11.10@225.025,23.475 227.05,23.475 C50.1@227.175,23.6
NetC50_2: C50.2 R32.1 | length 1.6
  Top Layer w0.254: C50.2@228.675,23.6 R32.1@230.275,23.6
NetC51_1: C51.1 U11.7 | length 2.2
  Top Layer w0.254: U11.7@225.025,21.975 226.925,21.975 C51.1@227.125,21.775
NetC51_2: C51.2 R33.1 | length 1.6
  Top Layer w0.254: C51.2@228.625,21.775 R33.1@230.2,21.775
NetC52_2: C52.2 U12.2 | length 6
  Top Layer w0.254: U12.2@230.88,13.925 230.88,15.73 232.65,17.5 C52.2@234.325,17.5
NetC53_1: C53.1 R32.2 U12.3 | length 14.4
  Top Layer w0.254: U12.3@229.61,13.925 229.61,16.135 233.675,20.2 233.675,22.6 232.6,23.675 231.85,23.675 C53.1@231.85,25.4
NetC54_1: C54.1 R33.2 U12.4 | length 11.5
  Top Layer w0.254: C54.1@226.675,18.05 229.2,18.05 231.775,20.625 R33.2@231.775,21.85 ; U12.4@228.34,13.925 228.34,18.015
NetC55_2: C55.2 C56.2 C57.2 C?.1 R36.1 U12.6 | length 14
  Top Layer w0.5: 225.25,2.5 225.275,2.525 R36.1@225.275,4.15 ; R36.1@225.25,4.175 C55.2@225.25,8.9 ; C55.2@225.275,8.925 C?.1@225.275,10.55 ; U12.6@229.61,8.289 229.61,6.79 v1@229.625,6.775
  Bottom Layer w0.5: v1(225.225,6.625) 225.4,6.8 v1(229.625,6.8)
NetC58_2: C58.2 J2.2 R37.2 | length 7.6
  Top Layer w0.254: R37.2@236.575,13.575 236.575,15.125 241.29,15.125 J2.2@242.2,14.215
NetC59_2: C59.2 J2.1 R38.2 | length 14.1
  Top Layer w0.254: C59.2@233.275,3.775 233.275,5.4 233.275,7 237.95,11.675 J2.1@242.2,11.675
NetC63_2: C63.2 R42.1 R43.1 | length 3.5
  Top Layer w0.254: R42.1@209.195,54.705 R43.1@209.195,56.43 ; R43.1@209.216,56.451 C63.2@209.216,58.179
NetC64_2: C64.2 R44.1 R45.1 | length 3.2
  Top Layer w0.254: R44.1@209.17,51.28 R45.1@209.17,52.855 ; C64.2@209.22,49.633 R44.1@209.22,51.23
NetC65_2: C65.2 C66.2 CE1.1 J3.4 J3.5 U20.2 U20.9 | length 40.6
  Top Layer w0.254: U20.9@202.675,55.625 201.775,55.625 200.675,54.525 200.675,52.45 201,52.125 202.675,52.125 204,52.125 205.125,51 205.125,46.975 203.925,45.775 C65.2@203.95,45.75
  Top Layer w0.5: C66.2@202.175,45.775 C65.2@203.925,45.775 ; C65.2@203.95,45.75 205.25,44.45 208.65,44.45 222.645,44.45 223.535,43.56 224.805,43.56 J3.5@226.075,44.83
NetC72_1: C72.1 D3.2 L3.1 U10.6@42.31,72.325 | length 17.3
  Top Layer w0.5: U10.6@42.11,72.4 42.11,66.365 42.15,66.325 45.175,66.325 45.175,59.104 D3.2@45.179,59.1 ; 42.181,70.829 C72.1@43.141,70.829
NetC72_2: C72.2 U10.1@44.85,72.325 | length 1.6
  Top Layer w0.5: C72.2@44.641,70.829 44.65,70.838 U10.1@44.65,72.4
NetC80_2: C80.2 U9.4 | length 11.8
  Top Layer w0.5: C80.2@24.2,19.162 28.713,19.162 32.353,15.522 U9.4@34.525,15.522
NetC81_2: C81.2 U9.7 Y4.1 | length 14.6
  Top Layer w0.5: C81.2@23.875,16 26.475,16 27.85,17.375 28.125,17.375 28.125,15.6 32.013,11.712 U9.7@34.525,11.712
NetC82_2: C82.2 U9.8 Y4.2 | length 12.1
  Top Layer w0.5: C82.2@23.85,11.05 26.68,11.05 28.125,12.495 29.533,11.087 30.15,11.087 30.795,10.442 U9.8@34.525,10.442
NetC101_1: C101.1 U30.4 | length 8.6
  Top Layer w0.254: C101.1@205.85,75.125 205.85,68.725 206.39,68.185 U30.4@207.875,68.185
NetCD1_2: CD1.2 DS1.2 Y1.2 | length 4
  Top Layer w0.254: CD1.2@89.8,28.537 90.12,28.217 91.4,28.217 DS1.2@93.65,28.217
NetCD2_2: CD2.2 DS1.3 Y1.1 | length 4.2
  Top Layer w0.254: CD2.2@89.775,26.262 90.46,26.947 91.4,26.947 DS1.3@93.65,26.947
NetD2_2: D2.2 L2.2 U11.2@13.725,66.8
NetD4_2: D4.2 Q2.3 R23.2 | length 5.9
  Top Layer w0.254: R23.2@47.981,11.181 D4.2@47.981,13.175 ; D4.2@47.981,13.487 48.533,12.935 Q2.3@51.675,12.935
NetFB1_1: FB1.1 P1.1 | length 2.7
  Top Layer w0.508: FB1.1@93.759,61.307 94.7,62.248 P1.1@94.7,63.612
NetJ3_9: J3.9 R50.1 | length 24.3
  Top Layer w0.5: R50.1@216.77,35.23 220.87,35.23 222.4,33.7 236.025,33.7 237.325,35 J3.9@237.325,37.575
NetJ3_11: J3.11 R49.1 | length 46.2
  Top Layer w0.5: R49.1@216.795,33.555 220.47,33.555 222.05,31.975 239.775,31.975 241.275,33.475 241.275,49.4 239.851,50.824 J3.11@237.325,50.824
NetLED1_2: LED1.2 R26.2 | length 21.4
  Top Layer w0.254: LED1.2@173.225,7.879 173.225,12.675 174.775,14.225 181.5,14.225 185.65,18.375 ; 185.675,18.35 R26.2@187.45,18.35
NetLED2_2: LED2.2 R25.2 | length 12.8
  Top Layer w0.254: LED2.2@179.775,7.979 179.775,10.425 186,16.65 R25.2@187.525,16.65
NetLED3_2: LED3.2 R24.2 | length 7.4
  Top Layer w0.254: LED3.2@186.475,8.079 186.35,8.204 186.35,13.725 R24.2@187.55,14.925
NetP18_2: P18.2 Q5.3 | length 8.8
  Top Layer w0.3: P18.2@1.7,45.325 7.5,45.325 8.21,44.615 Q5.3@10.243,44.615
NetQ1_2: Q1.2 Q2.1 R20.2 | length 6.8
  Top Layer w0.254: R20.2@45.525,16.812 45.552,16.839 50.725,16.839 50.725,15.285
NetQ1_3: Q1.3 R22.1@54.525,19.225 | length 2.8
  Top Layer w0.254: Q1.3@51.675,19.189 R22.1@54.464,19.189
NetQ2_2: Q2.2 R21.2 | length 8.7
  Top Layer w0.254: R21.2@45.55,15.312 48.95,15.312 50.275,13.987 52.25,13.987 52.625,14.362 52.625,15.285
NetQ5_2: Q5.2 R100.2 | length 2.1
  Top Layer w0.3: Q5.2@12.275,45.555 R100.2@14.38,45.555
NetR9_1: R9.1 U2.19 | length 3.7
  Top Layer w0.254: U2.19@181.618,27.631 182.706,27.631 183.3,28.225 183.3,29.85 R9.1@183.45,29.85
NetR20_1: R20.1 U9.14 | length 4.3
  Top Layer w0.254: U9.14@39.725,16.792 44.005,16.792 R20.1@44.025,16.812
NetR21_1: R21.1 U9.13 | length 4.4
  Top Layer w0.254: U9.13@39.725,15.522 39.728,15.525 43.837,15.525 R21.1@44.05,15.312
NetR22_1: R22.1@130.15,18.85 X1.3 | length 4.1
  Top Layer w0.254: R22.1@130.1,18.625 130.1,16.175 130.113,16.187 130.113,17.788
NetR28_1: R28.1 U10.25 | length 4.2
  Top Layer w0.254: U10.25@214.536,15.365 214.621,15.45 R28.1@218.675,15.45
NetR28_2: R28.2 U11.1@220.7,23.45 | length 12.7
  Top Layer w0.254: R28.2@220.175,15.45 220.175,16.3 219.325,17.15 218.55,17.15 217.25,18.45 217.25,22.95 217.775,23.475 U11.1@220.525,23.475
NetR29_1: R29.1 U10.24 | length 4
  Top Layer w0.254: U10.24@214.561,13.9 R29.1@218.6,13.9
NetR29_2: R29.2 R?.2 U11.2@220.7,22.95 | length 17.2
  Top Layer w0.254: R29.2@220.15,13.75 221,13.75 221.3,14.05 221.3,16.225 217.925,19.6 217.925,22.525 218.375,22.975 220.525,22.975 221.55,22.975 221.775,23.2 R?.2@221.775,25.15
NetR30_1: R30.1 U10.23 | length 4.3
  Top Layer w0.254: U10.23@214.536,12.365 214.671,12.5 216.775,12.5 217.225,12.05 R30.1@218.625,12.05
NetR30_2: R30.2 U11.3@220.7,22.45 | length 15
  Top Layer w0.254: R30.2@220.125,12.05 221.325,12.05 221.775,12.5 221.775,16.389 218.525,19.639 218.525,22.125 218.875,22.475 U11.3@220.525,22.475
NetR31_1: R31.1 U10.22 | length 4.3
  Top Layer w0.254: U10.22@214.536,10.835 214.576,10.875 216.4,10.875 216.875,10.4 R31.1@218.575,10.4
NetR31_2: R31.2 U11.4@220.7,21.95 | length 16.1
  Top Layer w0.254: R31.2@220.075,10.4 221.6,10.4 222.35,11.15 222.35,16.65 219.025,19.975 219.025,21.575 219.425,21.975 U11.4@220.525,21.975
NetR34_1: R34.1 R35.2 | length 2.2
  Top Layer w0.254: R35.2@236.05,17.525 237.525,19 R34.1@237.675,19
NetR34_2: R34.2 U12.1 | length 8.2
  Top Layer w0.254: U12.1@232.15,13.925 232.15,15.25 232.9,16 237,16 237.65,16.65 R34.2@237.65,17.475
NetR37_1: R37.1 U12.8 | length 6.9
  Top Layer w0.254: U12.8@232.15,8.289 233.95,10.089 233.95,13.3 234.15,13.5 R37.1@235,13.5
NetR38_1: R38.1 U12.5 | length 6.1
  Top Layer w0.254: U12.5@228.34,8.289 228.34,5.85 228.79,5.4 R38.1@231.775,5.4
NetR41_1: R41.1 U20.44 | length 4.5
  Top Layer w0.254: R41.1@199.4,45.801 U20.44@199.4,50.35
NetR41_2: R41.2 X2.3 | length 3.1
  Top Layer w0.254: R41.2@199.395,44.295 199.35,44.251 199.35,41.35 X2.3@199.425,41.275
NetR46_2: R46.2 U20.1 | length 4.2
  Top Layer w0.254: R46.2@202.505,47.47 202.675,47.64 U20.1@202.675,51.625
NetR47_1: R47.1 U20.20 | length 3.6
  Top Layer w0.254: U20.20@197.9,58.4 R47.1@197.9,62.026
NetR52_1: R52.1 R53.1 U11.4@13.725,70.2 | length 17.5
  Top Layer w0.5: U11.4@13.675,70.15 16.05,70.15 v1@16.075,70.125 ; R52.1@17.35,58.625 v1(18.3,58.625) R53.1@19.4,58.625
  Bottom Layer w0.5: v1(16.025,70.175) 16.925,70.175 18.275,68.825 18.275,58.65 v1(18.3,58.625)
NetR54_1: R54.1 U10.4@42.31,74.23 | length 6.3
  Top Layer w0.5: R54.1@37.025,75.75 41.55,75.75 42.11,75.19 U10.4@42.11,74.205
NetR55_1: R55.1 R56.2 R57.2 U10.3@44.85,74.23 | length 6.4
  Top Layer w0.5: U10.3@44.65,74.305 R55.1@47.13,74.305 ; R55.1@47.3,74.375 R56.2@51.25,74.375
NetU30_5: U30.5 USB_3.3 | length 26.5
  Top Layer w0.5: U30.5@207.875,69.455 209.97,69.455 218.925,60.5 230.575,60.5 USB_3.3@230.625,60.55
NetU30_6: U30.6 USB_3.2 | length 26.3
  Top Layer w0.5: U30.6@207.875,70.725 210.65,70.725 219.225,62.15 USB_3.2@230.625,62.15
NRST: C1.2 D4.1 D18.1 D24.1 K7.1 P1.5 R1.2 U5.34 | length 373.5
  Top Layer w0.254: v1(44.425,12.125) D4.1@44.425,13.487 ; 64.85,37.475 64.95,37.475 77.6,24.825 103.45,24.825 105.475,22.8 v1(108.65,22.8) ; v1(66.278,37.577) 66.278,51.277 65.25,52.305 65.25,65.247 64.975,65.522 64.875,65.622 65.628,66.375 82.575,66.375 84.525,64.425 84.525,64.064 84.402,64.064 84.138,63.799 P1.5@84.138,63.612 ; P1.5@84.54,63.612 84.575,63.577 84.575,61.404 D24.1@84.59,61.389 ; U5.34@130.851,24.997 130.851,23.649 v1(131.15,23.35) ; v1@131.15,23.325 131.35,23.325 133.95,20.725 133.95,20.05 136.85,20.05 137.2,19.7 137.2,17.325 137.75,16.775 R1.2@138.7,16.775
  Bottom Layer w0.254: v1@44.475,12.1 46.325,12.1 56.325,22.1 56.325,30.975 58.1,32.75 60.075,32.75 64.902,37.577 v1(66.278,37.577) ; v1@108.6,22.75 110.723,24.873 129.727,24.873 131.15,23.45 v1(131.15,23.35)
  Bottom Layer w0.5: v1(131.15,23.35) 131.15,17.625 133.125,15.65 155.925,15.65 169.8,1.775 232.45,1.775 236.15,5.475 236.15,12.325 241.15,17.325 241.15,64.9 237.075,68.975 231.425,68.975 230.55,69.85 K7.1@229.45,69.85
PE: CV1.1 J3.13 YM1.1
PHY_3.3V: C67.2 C68.2 FB10.2 R49.2 R50.2 | length 10.1
  Top Layer w0.5: FB10.2@210.425,31.664 210.425,35.325 R50.2@215.176,35.325 ; R49.2@215.245,33.43 R50.2@215.245,35.105
PHY_AGND: C63.1 C64.1 C65.1 C66.1 C67.1 C68.1 CE1.2 CV1.2 R46.1 R51.1 U20.5 U20.6 U20.47 U20.48 YM1.2 | length 51.1
  Top Layer w0.254: v1@200.9,51.575 U20.47@200.9,50.35 ; 201.375,44.25 200.9,44.725 U20.47@200.9,50.35 ; U20.48@201.4,50.35 U20.47@200.9,50.35 ; v1(201.4,53.6) 201.425,53.625 202.675,53.625 U20.6@202.675,54.125 ; v1@205.354,58.179 C63.1@207.716,58.179 ; CE1.2@208.65,38.1 CE1.2@208.92,37.83
  Top Layer w0.5: 201.375,44.25 203.95,44.25 v1(203.95,42.1) 203.95,38.5 204.35,38.1 CE1.2@208.65,38.1 ; R51.1@206.745,35.33 208.92,35.33 CE1.2@208.92,37.83 ; C64.1@207.691,49.604 207.691,46.934 v1(207.7,46.925) v1@207.725,46.9 ; C68.1@208.9,33.7 208.925,33.725 C67.1@208.925,35.325
  Bottom Layer w0.254: v1(200.925,51.525) 200.925,53.125 v1(201.4,53.6) 201.4,54.125 v1(205.4,58.125)
  Bottom Layer w0.5: v1(203.95,42.1) 206.525,42.1 207.7,43.275 v1(207.7,46.925)
RESET: U5.194
SCQ_D1: U5.156 USCQ1.2 USCQ2.2 USCQ3.2 USCQ4.2 USCQ5.2 USCQ6.2 USCQ7.2 USCQ8.2 USCQ9.2 USCQ10.2 USCQ11.2 USCQ12.2 USCQ13.2 USCQ14.2 USCQ15.2 | length 327.6
  Top Layer w0.3: USCQ7.2@110.78,80.1 110.78,70.92 114.11,67.59 114.11,56.601 114.351,56.36 U5.156@114.351,54.147 ; USCQ8.2@124.73,80.1 USCQ8.2@124.75,80.08
  Top Layer w0.4: USCQ1.2@27.005,80.1 v1@27.005,87.045 ; USCQ2.2@40.98,80.1 v1@40.98,87.07 ; USCQ3.2@54.88,80.1 v1@54.88,87.055 ; USCQ4.2@68.805,80.1 v1@68.805,87.045 ; USCQ5.2@82.83,80.1 v1@82.83,87.07 ; USCQ6.2@96.805,80.1 v1@96.805,87.045 ; USCQ7.2@110.78,80.1 v1@110.78,87.095 ; USCQ8.2@124.73,80.1 v1@124.73,87.08 ; USCQ9.2@138.73,80.1 v1@138.73,87.055 ; USCQ10.2@152.655,80.1 v1@152.655,87.055 ; USCQ11.2@166.68,80.1 v1@166.68,87.095 ; USCQ12.2@180.705,80.1 v1@180.705,87.07 ; USCQ13.2@194.655,80.125 v1@194.655,87.07 ; USCQ14.2@208.68,80.125 v1@208.68,87.055 ; v1@222.725,87.075 222.73,87.07 USCQ15.2@222.73,80.125
  Bottom Layer w0.4: v1@26.975,87.05 v1(27.025,87.05) v1(68.825,87.05) v1(82.85,87.05) 96.775,87.05 v1(96.8,87.075) v1(110.775,87.075) v1(152.65,87.075) v1(166.675,87.075) v1(180.725,87.075) v1(194.65,87.075) 222.7,87.075 v1(222.725,87.05)
  other v1: 54.9,87.025 138.75,87.05 40.95,87.075 208.7,87.075 124.725,87.1
SCQ_D2: U5.155 USCQ1.3 USCQ2.3 USCQ3.3 USCQ4.3 USCQ5.3 USCQ6.3 USCQ7.3 USCQ8.3 USCQ9.3 USCQ10.3 USCQ11.3 USCQ12.3 USCQ13.3 USCQ14.3 USCQ15.3 | length 317.3
  Top Layer w0.3: USCQ7.3@112.05,80.1 112.05,70.8 114.608,68.242 114.608,56.808 114.851,56.565 U5.155@114.851,54.147 ; USCQ8.3@125.9,80 USCQ8.3@126,80.1
  Top Layer w0.4: USCQ1.3@28.275,80.1 v1(28.275,86.35) ; USCQ2.3@42.2,80.15 42.25,80.1 42.25,86.375 v1@42.225,86.4 ; USCQ3.3@56.15,80.1 v1@56.15,86.425 ; USCQ4.3@70.075,80.1 v1(70.075,86.375) ; USCQ5.3@84.1,80.1 v1(84.1,86.4) ; USCQ6.3@98.075,80.1 v1@98.075,86.4 ; USCQ7.3@112.05,80.1 v1@112.05,86.375 ; USCQ8.3@126,80.1 v1(126,86.375) ; USCQ9.3@140,80.1 v1@140,86.375 ; USCQ10.3@153.925,80.1 v1(153.925,86.375) ; USCQ11.3@167.95,80.1 v1(167.95,86.375) ; USCQ12.3@181.975,80.1 v1(181.975,86.375) ; USCQ13.3@195.925,80.125 v1(195.925,86.4) ; USCQ14.3@209.95,80.125 v1(209.95,86.375) ; USCQ15.3@224,80.125 v1(224,86.375)
  Bottom Layer w0.4: v1@28.25,86.375 v1(42.275,86.375) v1(70.075,86.375) v1(126,86.375) v1(153.925,86.375) v1(167.95,86.375) v1(181.975,86.375) v1(224,86.375)
  other v1: 140,86.35 56.15,86.4 112.05,86.4 98.075,86.425
SCQ_D3: U5.154 USCQ1.4 USCQ2.4 USCQ3.4 USCQ4.4 USCQ5.4 USCQ6.4 USCQ7.4 USCQ8.4 USCQ9.4 USCQ10.4 USCQ11.4 USCQ12.4 USCQ13.4 USCQ14.4 USCQ15.4 | length 305.6
  Top Layer w0.3: USCQ7.4@113.32,80.1 113.32,70.83 115.106,69.044 115.106,57.014 115.351,56.769 U5.154@115.351,54.147
  Top Layer w0.4: USCQ1.4@29.545,80.1 v1@29.545,85.62 ; USCQ2.4@43.52,80.1 v1@43.52,85.63 ; USCQ3.4@57.42,80.1 v1@57.42,85.67 ; USCQ4.4@71.345,80.1 v1@71.345,85.67 ; USCQ5.4@85.37,80.1 v1@85.37,85.67 ; USCQ6.4@99.345,80.1 v1@99.345,85.645 ; USCQ7.4@113.32,80.1 v1@113.32,85.645 ; USCQ8.4@127.27,80.1 v1@127.27,85.655 ; USCQ9.4@141.27,80.1 v1@141.27,85.62 ; USCQ10.4@155.195,80.1 v1@155.195,85.645 ; USCQ11.4@169.22,80.1 169.22,85.645 v1(169.225,85.65) ; USCQ12.4@183.245,80.1 v1@183.245,85.645 ; USCQ13.4@197.195,80.125 v1@197.195,85.655 ; USCQ14.4@211.22,80.125 v1@211.22,85.645 ; USCQ15.4@225.27,80.125 v1@225.27,85.62
  Bottom Layer w0.4: v1@29.575,85.65 v1(43.525,85.65) v1(57.425,85.65) v1(85.375,85.65) v1(99.35,85.65) v1(113.3,85.65) v1(127.275,85.65) v1(169.225,85.65) v1(183.25,85.65) v1(197.2,85.65) v1(225.25,85.65)
  other v1: 29.55,85.625 71.35,85.625 141.3,85.625 155.225,85.625 211.225,85.65
SCQ_D4: U5.153 USCQ1.5 USCQ2.5 USCQ3.5 USCQ4.5 USCQ5.5 USCQ6.5 USCQ7.5 USCQ8.5 USCQ9.5 USCQ10.5 USCQ11.5 USCQ12.5 USCQ13.5 USCQ14.5 USCQ15.5 | length 294.6
  Top Layer w0.3: USCQ7.5@114.59,80.1 114.59,70.76 115.604,69.746 115.604,57.22 115.851,56.973 U5.153@115.851,54.147
  Top Layer w0.4: USCQ1.5@30.815,80.1 v1@30.815,84.915 ; USCQ2.5@44.79,80.1 v1@44.79,84.885 ; USCQ3.5@58.69,80.1 v1@58.69,84.915 ; USCQ4.5@72.615,80.1 v1@72.615,84.915 ; USCQ5.5@86.64,80.1 v1@86.64,84.89 ; USCQ6.5@100.615,80.1 v1@100.615,84.885 ; USCQ7.5@114.59,80.1 v1@114.59,84.865 ; USCQ8.5@128.54,80.1 v1@128.54,84.915 ; USCQ9.5@142.54,80.1 142.54,84.885 v1@142.56,84.885 ; USCQ10.5@156.465,80.1 v1@156.465,84.985 ; USCQ11.5@170.49,80.1 v1@170.49,84.965 ; USCQ12.5@184.515,80.1 v1@184.515,84.965 ; v1@198.46,84.965 198.465,84.965 USCQ13.5@198.465,80.125 ; USCQ14.5@212.49,80.125 v1@212.49,84.985 ; USCQ15.5@226.54,80.125 v1@226.54,84.915
  Bottom Layer w0.4: v1@30.8,84.9 v1(30.825,84.9) v1(44.8,84.9) v1(58.7,84.9) v1(72.625,84.9) v1(86.65,84.9) v1(100.6,84.9) v1(114.6,84.9) v1(128.575,84.975) v1(184.525,84.975) v1(198.475,84.975) v1(226.575,84.975)
  other v1: 142.575,84.9 156.5,84.95 170.5,84.95 212.5,84.95
SCQ_D5: U5.152 USCQ1.6 USCQ2.6 USCQ3.6 USCQ4.6 USCQ5.6 USCQ6.6 USCQ7.6 USCQ8.6 USCQ9.6 USCQ10.6 USCQ11.6 USCQ12.6 USCQ13.6 USCQ14.6 USCQ15.6 | length 284.1
  Top Layer w0.3: USCQ7.6@115.86,80.1 115.875,80.085 115.875,70.5 116.102,70.273 116.102,57.427 116.351,57.178 U5.152@116.351,54.147
  Top Layer w0.4: USCQ1.6@32.085,80.1 v1@32.085,84.24 ; USCQ2.6@46.06,80.1 v1@46.06,84.24 ; USCQ3.6@59.96,80.1 v1@59.96,84.24 ; USCQ4.6@73.885,80.1 v1@73.885,84.265 ; USCQ5.6@87.91,80.1 v1@87.91,84.265 ; USCQ6.6@101.885,80.1 v1@101.885,84.24 ; USCQ7.6@115.86,80.1 v1@115.86,84.24 ; USCQ8.6@129.81,80.1 v1@129.81,84.26 ; USCQ9.6@143.81,80.1 v1@143.81,84.24 ; USCQ10.6@157.735,80.1 v1@157.735,84.235 ; USCQ11.6@171.76,80.1 v1@171.76,84.235 ; USCQ12.6@185.785,80.1 v1@185.785,84.265 ; USCQ13.6@199.735,80.125 v1@199.735,84.29 ; USCQ14.6@213.76,80.125 v1@213.76,84.235 ; USCQ15.6@227.81,80.125 v1@227.81,84.265
  Bottom Layer w0.4: v1@32.075,84.25 v1(46.05,84.25) v1(73.875,84.25) v1(101.9,84.25) v1(129.825,84.25) v1(171.75,84.25) v1(199.725,84.25) v1(227.825,84.25)
  other v1: 32.1,84.2 59.95,84.225 87.9,84.225 115.85,84.225 157.75,84.225 143.825,84.275 185.775,84.275 213.775,84.275
SCQ_D6: U5.151 USCQ1.7 USCQ2.7 USCQ3.7 USCQ4.7 USCQ5.7 USCQ6.7 USCQ7.7 USCQ8.7 USCQ9.7 USCQ10.7 USCQ11.7 USCQ12.7 USCQ13.7 USCQ14.7 USCQ15.7 | length 273.9
  Top Layer w0.3: U5.151@116.851,54.147 116.851,57.382 116.6,57.633 116.6,68.925 117.13,69.455 USCQ7.7@117.13,80.1 ; USCQ8.7@131.025,80.045 USCQ8.7@131.08,80.1
  Top Layer w0.4: USCQ1.7@33.355,80.1 v1@33.355,83.545 ; v1(47.325,83.55) 47.33,83.545 USCQ2.7@47.33,80.1 ; USCQ3.7@61.23,80.1 v1@61.23,83.57 ; USCQ4.7@75.155,80.1 v1@75.155,83.57 ; USCQ5.7@89.18,80.1 v1@89.18,83.57 ; USCQ6.7@103.155,80.1 v1@103.155,83.555 ; USCQ7.7@117.13,80.1 v1@117.13,83.545 ; USCQ8.7@131.08,80.1 v1@131.08,83.545 ; USCQ9.7@145.08,80.1 v1@145.08,83.545 ; USCQ10.7@159.005,80.1 v1@159.005,83.545 ; USCQ11.7@173.03,80.1 v1@173.03,83.545 ; USCQ12.7@187.055,80.1 v1@187.055,83.57 ; USCQ13.7@201.005,80.125 v1@201.005,83.52 ; USCQ14.7@215.03,80.125 v1@215.03,83.545 ; USCQ15.7@229.08,80.125 v1@229.08,83.595
  Bottom Layer w0.4: v1@33.3,83.55 v1(33.375,83.55) v1(47.325,83.55) v1(61.225,83.55) v1(89.175,83.55) v1(117.15,83.55) v1(145.1,83.55) v1(173.05,83.55) v1(229.075,83.55)
  other v1: 103.175,83.525 159.025,83.525 187.05,83.525 215.025,83.55 75.175,83.575 131.1,83.575 201,83.575
SCQ_D7: U5.141 USCQ1.8 USCQ2.8 USCQ3.8 USCQ4.8 USCQ5.8 USCQ6.8 USCQ7.8 USCQ8.8 USCQ9.8 USCQ10.8 USCQ11.8 USCQ12.8 USCQ13.8 USCQ14.8 USCQ15.8 | length 264.5
  Top Layer w0.3: USCQ7.8@118.4,80.1 118.4,76.4 121.85,72.95 121.85,59.2 121.851,59.199 U5.141@121.851,54.147 ; USCQ8.8@132.3,79.825 132.35,79.875 USCQ8.8@132.35,80.1
  Top Layer w0.4: USCQ1.8@34.625,80.1 v1@34.625,82.85 ; USCQ2.8@48.6,80.1 v1@48.6,82.875 ; v1(62.475,82.85) 62.475,80.125 USCQ3.8@62.5,80.1 ; USCQ4.8@76.425,80.1 v1@76.425,82.85 ; v1@90.425,82.875 90.425,80.125 USCQ5.8@90.45,80.1 ; USCQ6.8@104.425,80.1 v1@104.425,82.825 ; USCQ7.8@118.4,80.1 v1(118.4,82.85) ; USCQ8.8@132.35,80.1 v1(132.35,82.825) ; USCQ9.8@146.35,80.1 v1@146.35,82.85 ; USCQ10.8@160.275,80.1 v1@160.275,82.825 ; USCQ11.8@174.3,80.1 v1@174.3,82.85 ; USCQ12.8@188.325,80.1 v1(188.325,82.85) ; USCQ13.8@202.275,80.125 v1@202.275,82.85 ; USCQ14.8@216.3,80.125 v1@216.3,82.85 ; USCQ15.8@230.35,80.125 v1@230.35,82.825
  Bottom Layer w0.4: v1@34.65,82.85 v1(48.6,82.85) v1(62.475,82.85) v1(90.4,82.85) v1(118.4,82.85) v1(188.325,82.85) v1(202.3,82.85) v1(230.35,82.85)
  other v1: 160.275,82.8 34.65,82.825 76.425,82.825 104.45,82.825 174.3,82.825 216.3,82.825 146.35,82.875